# Altium PCB FPv1.3.5.PcbDoc (part 7 of 9)
Units mil, origin at the board's own origin, x right, y up, seen from the top; angles counter-clockwise.
Board outline 3200 x 2100 mil, 4 copper layers (Top Layer, GROUND PLANE, POWER PLANE, Bottom Layer); 98 components, 183 nets, 614 pads, 312 vias.
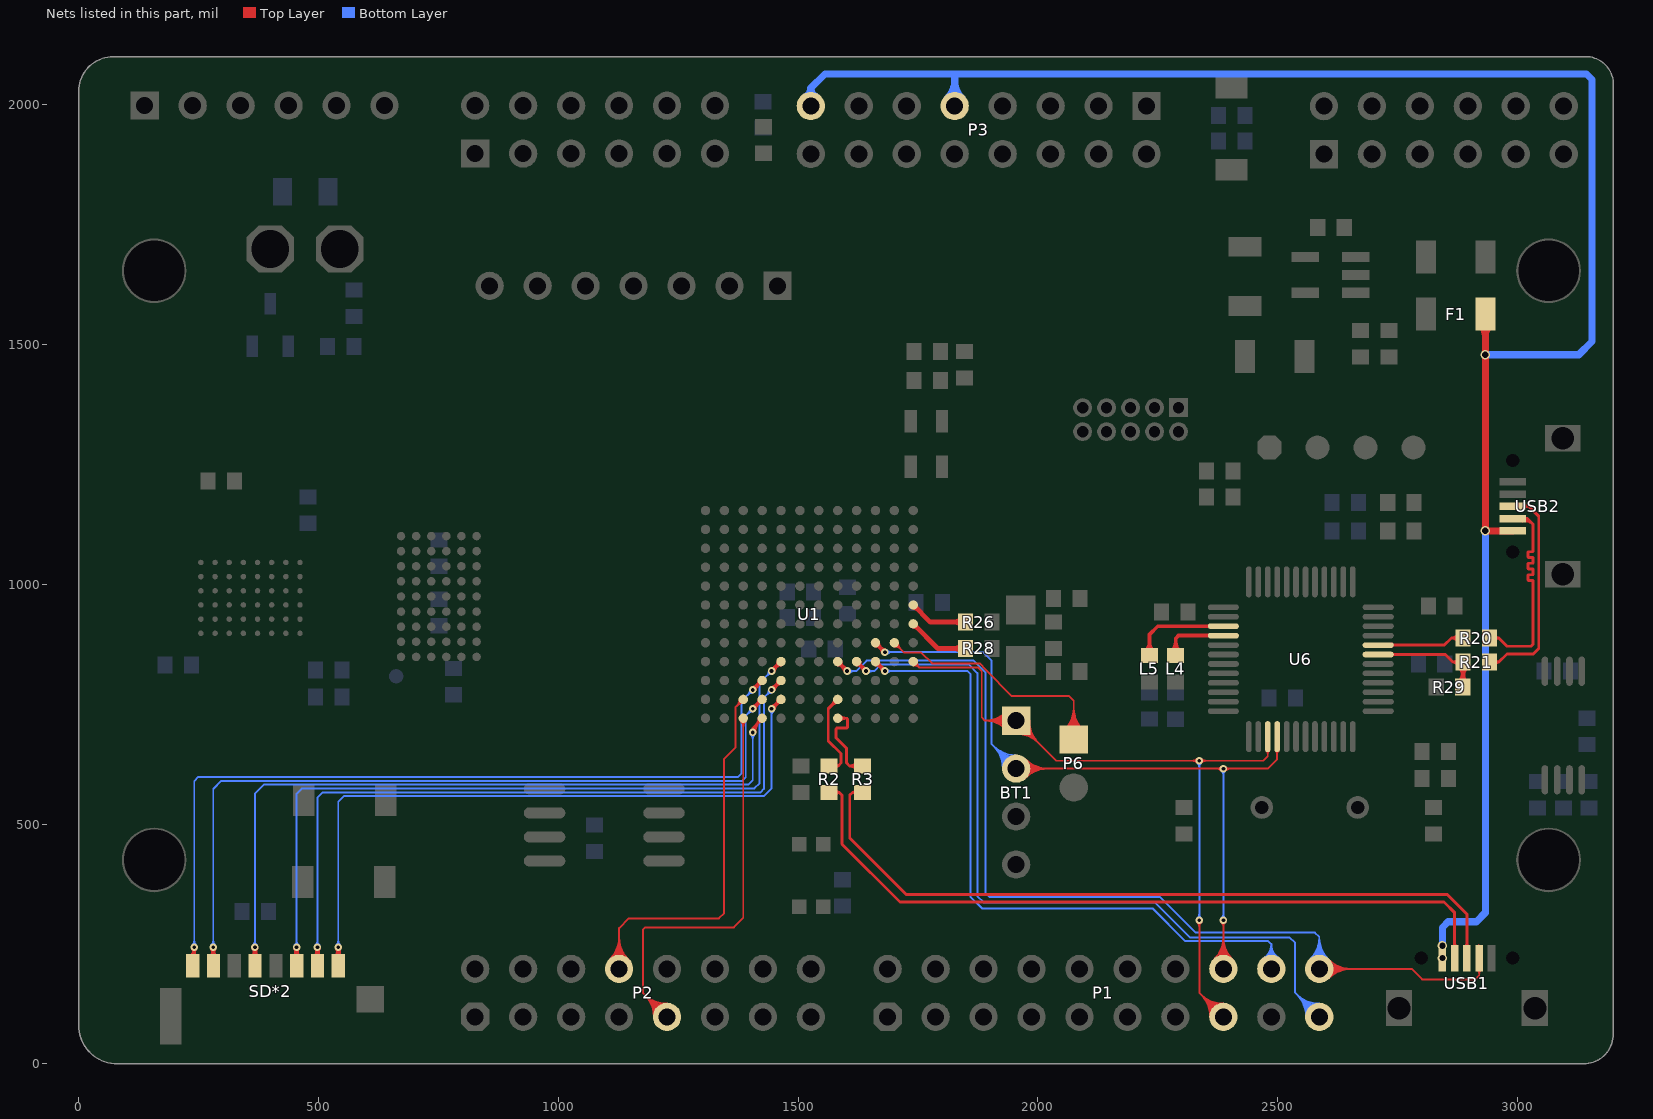
[diagram p9: the nets of this part, all layers, seen from the top]

## Via types
v1: diameter 15.87, hole 7.87, Top Layer to Bottom Layer, tented both sides, 261 vias
v2: diameter 19.8, hole 11.81, Top Layer to Bottom Layer, tented both sides, 25 vias
v3: diameter 23.62, hole 15.75, Top Layer to Bottom Layer, tented both sides, 11 vias
v4: diameter 20, hole 13, Top Layer to Bottom Layer, tented both sides, 5 vias
v5: diameter 27.68, hole 15.75, Top Layer to Bottom Layer, tented both sides, 3 vias
v6: diameter 23.74, hole 15.75, Top Layer to Bottom Layer, tented both sides, 2 vias
v7: diameter 19.8, hole 9.84, Top Layer to Bottom Layer, tented both sides, 2 vias
v8: diameter 23.62, hole 9.45, Top Layer to Bottom Layer, tented both sides, 1 vias
v9: diameter 17.24, hole 9.06, Top Layer to Bottom Layer, tented both sides, 1 vias
v10: diameter 23.74, hole 11.81, Top Layer to Bottom Layer, tented both sides, 1 vias

## Nets (pads, with @x,y where several pads share a name; then routed paths per layer and width w, separated by ;. In a path a pad name is that pad's centre, name@x,y a point inside that pad or via, vN(x,y) a via of type N, cw(c..) or ccw(c..) an arc to the next point about the centre after c; other vN are vias at no path point) (continued)
PTD14: P2.8 U1.C2 | length 1135.7
  Top Layer w4: P2.8@1107.35,217.3 ccw(c1060.35,264.29) 1126.81,264.29 ccw(c1193.27,264.29) P2.8@1146.28,217.3 ; P2.8@1110.17,214.47 ccw(c1070.01,254.64) 1126.81,254.64 ccw(c1183.61,254.64) P2.8@1143.45,214.47 ; P2.8@1113,211.64 ccw(c1079.67,244.98) 1126.81,244.98 ccw(c1173.95,244.98) P2.8@1140.62,211.64 ; P2.8@1115.83,208.81 ccw(c1089.32,235.32) 1126.81,235.32 ccw(c1164.3,235.32) P2.8@1137.79,208.81 ; P2.8@1126.81,197.83 1126.81,282.81 1147,303 1335,303 1346,314 1346,636 1369.98,659.98 1369.98,744 U1.C2@1385.83,759.84 ; U1.C2@1377.98,759.84 cw(c1359.05,759.84) 1372.44,746.45 cw(c1385.83,733.07) U1.C2@1385.83,752
PTD15: P2.9 U1.C1 | length 1194.1
  Top Layer w4: P2.9@1199.28,97.83 ccw(c1132.83,97.83) 1179.82,144.83 ccw(c1226.81,191.82) P2.9@1226.81,125.36 ; P2.9@1203.28,97.83 ccw(c1146.48,97.83) 1186.65,138 ccw(c1226.81,178.16) P2.9@1226.81,121.36 ; P2.9@1207.28,97.83 ccw(c1160.14,97.83) 1193.48,131.17 ccw(c1226.81,164.51) P2.9@1226.81,117.36 ; P2.9@1211.28,97.83 ccw(c1173.8,97.83) 1200.3,124.34 ccw(c1226.81,150.85) P2.9@1226.81,113.36 ; P2.9@1226.81,97.83 1177.17,147.48 1177.17,280.17 1181.45,284.45 1366.14,284.45 1385.83,304.13 U1.C1@1385.83,720.47 ; U1.C1@1380.28,714.93 cw(c1366.89,701.54) 1385.83,701.54 cw(c1404.76,701.54) U1.C1@1391.37,714.93
PTE0: SD*2.8 U1.D3 | length 2046
  Top Layer w4: SD*2.8@231.44,224.78 ccw(c218.97,243.11) v1(241.14,243.11) SD*2.8@241.14,207.28 ; SD*2.8@233.69,221.47 ccw(c224.11,235.55) v1@241.14,235.55 ; v1@236.57,239.32 cw(c230.31,234.13) 238.17,232.02 cw(c246.03,229.92) v1@243.2,237.55 ; v1@236.95,238.91 cw(c226.82,228.79) 241.14,228.79 cw(c255.47,228.79) v1@245.34,238.91 ; v1@237.22,238.66 cw(c231.74,232.45) 239.74,230.31 ; v1@238.18,237.97 cw(c234.13,230.96) 241.95,233.06 ; 240.55,233.33 cw(c247.93,231.35) v1@244.11,237.97 ; v1@241.14,236.06 ccw(c259.1,236.06) SD*2.8@246.4,223.37 ; 242.73,230.14 cw(c251.17,232.4) v1@245.2,238.78 ; v1@1404.01,785.27 ccw(c1398.48,806.37) U1.D3@1417.37,795.46 ; v1@1405.02,781.4 ccw(c1401.89,793.34) 1412.58,787.17 ; v1(1405.51,779.53) U1.D3@1425.2,799.21 ; v1@1405.51,785.46 ccw(c1405.51,799.78) 1415.64,789.66 ccw(c1425.77,779.53) v1@1411.44,779.53 ; v1@1407.38,779.04 cw(c1419.32,775.91) 1413.15,786.6 ; v1@1407.48,785.13 ccw(c1408.86,789.06) 1412.47,786.98 ; v1@1411.11,781.49 cw(c1415.05,782.88) 1412.96,786.49 ; v1@1411.25,778.02 cw(c1432.36,772.49) U1.D3@1421.45,791.39 ; U1.D3@1417.35,799.21 cw(c1398.42,799.21) 1411.81,785.82 cw(c1425.2,772.44) U1.D3@1425.2,791.37 ; v1@1407.05,785.26 ccw(c1408.72,791.49) 1411.94,785.9 cw(c1408.72,791.49) v1@1407.05,785.26 ; v1@1411.24,781.06 cw(c1417.48,782.73) 1411.89,785.96 ccw(c1417.48,782.73) v1@1411.24,781.06
  Bottom Layer w4: v1@236.95,247.31 ccw(c226.82,257.43) 241.14,257.43 ccw(c255.47,257.43) v1@245.34,247.31 ; v1(241.14,243.11) 241.14,589.57 249.65,598.07 1375.07,598.07 1382,605 1382,756.02 v1(1405.51,779.53) ; v1@1399.58,779.53 cw(c1385.26,779.53) 1395.38,769.4 cw(c1405.51,759.27) v1@1405.51,773.59
PTE1: SD*2.7 U1.D2 | length 1988.3
  Top Layer w4: SD*2.7@273.05,223.37 ccw(c254.69,241.73) v1@280.65,241.73 ; v1@275.67,239.89 cw(c264.65,232.74) 277.34,229.35 ; SD*2.7@275.88,220.54 ccw(c264.35,232.07) 280.65,232.07 ; v1@276.46,238.91 cw(c266.33,228.79) 280.65,228.79 cw(c294.98,228.79) v1@284.85,238.91 ; 277.52,230.02 cw(c290.17,226.63) v1@283.62,237.97 ; v1@277.92,237.84 cw(c272.28,226.95) 284.13,230.12 cw(c295.98,233.3) v1@285.65,239.91 ; SD*2.7@280.65,204.94 v1(280.65,243.11) ccw(c306.63,243.11) SD*2.7@289.26,223.8 ; 280.65,234.13 ccw(c298.55,234.13) SD*2.7@286.58,220.82 ; v1@1404.01,745.9 ccw(c1398.48,767) U1.D2@1417.37,756.09 ; v1@1405.02,742.03 ccw(c1401.89,753.97) 1412.58,747.8 ; v1(1405.51,740.16) U1.D2@1425.2,759.84 ; v1@1405.51,746.09 ccw(c1405.51,760.41) 1415.64,750.29 ccw(c1425.77,740.16) v1@1411.44,740.16 ; v1@1407.38,739.67 cw(c1419.32,736.54) 1413.15,747.23 ; v1@1407.48,745.76 ccw(c1408.86,749.69) 1412.47,747.61 ; v1@1411.11,742.12 cw(c1415.05,743.51) 1412.96,747.12 ; v1@1411.25,738.65 cw(c1432.36,733.12) U1.D2@1421.45,752.02 ; U1.D2@1417.35,759.84 cw(c1398.42,759.84) 1411.81,746.45 cw(c1425.2,733.07) U1.D2@1425.2,752 ; v1@1407.05,745.89 ccw(c1408.72,752.12) 1411.94,746.53 cw(c1408.72,752.12) v1@1407.05,745.89 ; v1@1411.24,741.69 cw(c1417.48,743.36) 1411.89,746.59 ccw(c1417.48,743.36) v1@1411.24,741.69
  Bottom Layer w4: v1@276.46,247.31 ccw(c266.33,257.43) 280.65,257.43 ccw(c294.98,257.43) v1@284.85,247.31 ; v1@280.51,249.02 v1@280.65,248.88 ; v1(280.65,243.11) v1@280.65,248.88 ; v1@1399.58,740.16 cw(c1385.26,740.16) 1395.38,730.03 cw(c1405.51,719.9) v1@1405.51,734.22 ; v1@1409.45,744.09 1391,725.65 1391,597.17 1383.9,590.07 297.75,590.07 280.65,572.98 v1@280.65,248.88
PTE2: SD*2.5 U1.D1 | length 1834.9
  Top Layer w4: SD*2.5@359.66,223.37 ccw(c340.63,242.4) v1@367.55,242.4 ; SD*2.5@362.49,220.54 ccw(c350.28,232.75) 367.55,232.75 ; v1@362.48,240.03 cw(c350.65,232.83) 364.02,229.25 ; v1@363.35,238.91 cw(c353.22,228.79) 367.55,228.79 cw(c381.87,228.79) v1@371.74,238.91 ; 364.13,229.65 cw(c377.36,226.11) v1@370.51,237.97 ; v1@364.73,237.89 cw(c358.58,226.47) 371.11,229.83 cw(c383.63,233.18) v1@372.6,239.99 ; SD*2.5@367.55,204.66 v1(367.55,243.11) ccw(c394.11,243.11) SD*2.5@376.02,223.66 ; 367.55,233.92 ccw(c385.56,233.92) SD*2.5@373.29,220.74 ; v1@1402.77,696.26 ccw(c1400.41,700.79) 1405.51,700.79 ; v1@1403.44,691 cw(c1422.08,691) 1408.9,704.18 ; v1(1405.51,691) 1405.51,700.79 ; v1@1407.44,691 cw(c1435.74,691) 1415.73,711.01 ; v1@1408.26,696.26 cw(c1410.62,700.79) 1405.51,700.79 ; v1@1411.44,691 cw(c1449.4,691) U1.D1@1422.56,717.84 ; U1.D1@1417.35,720.47 cw(c1398.42,720.47) 1411.81,707.08 cw(c1425.2,693.7) U1.D1@1425.2,712.63 ; U1.D1@1425.2,720.47 1405.51,700.79
  Bottom Layer w4: v1@363.35,247.31 ccw(c353.22,257.43) 367.55,257.43 ccw(c381.87,257.43) v1@371.74,247.31 ; v1(367.55,243.11) 367.55,563.41 386.2,582.07 1396.07,582.07 1405.51,591.51 v1(1405.51,691) ; v1@1401.32,686.8 cw(c1391.19,676.68) 1405.51,676.68 cw(c1419.84,676.68) v1@1409.71,686.8
PTE3: SD*2.3 U1.E4 | length 1922.3
  Top Layer w4: SD*2.3@446.28,223.37 ccw(c426.56,243.08) v1(454.44,243.11) ; SD*2.3@449.11,220.54 ccw(c436.22,233.43) 454.44,233.43 ; v1@449.3,240.14 cw(c436.88,232.97) 450.74,229.26 ; v1@450.25,238.91 cw(c440.12,228.79) 454.44,228.79 cw(c468.77,228.79) v1@458.64,238.91 ; 450.75,229.29 cw(c464.56,225.59) v1@457.41,237.97 ; v1@451.54,237.93 cw(c444.84,225.97) 458.08,229.52 cw(c471.33,233.07) v1@459.54,240.08 ; SD*2.3@454.44,204.38 v1(454.44,243.11) ; 454.44,233.71 ccw(c472.57,233.71) SD*2.3@460,220.64 ; SD*2.3@462.77,223.53 cw(c481.62,243.11) v1(454.44,243.11) ; v1@1443.38,824.64 ccw(c1437.85,845.74) U1.E4@1456.74,834.83 ; v1@1444.39,820.77 ccw(c1441.26,832.71) 1451.95,826.54 ; v1(1444.88,818.9) U1.E4@1464.57,838.58 ; v1@1444.88,824.83 ccw(c1444.88,839.15) 1455.01,829.03 ccw(c1465.14,818.9) v1@1450.81,818.9 ; v1@1446.75,818.41 cw(c1458.69,815.28) 1452.52,825.97 ; v1@1446.85,824.5 ccw(c1448.23,828.43) 1451.84,826.35 ; v1@1450.48,820.86 cw(c1454.42,822.25) 1452.33,825.86 ; v1@1450.62,817.39 cw(c1471.73,811.86) U1.E4@1460.82,830.76 ; U1.E4@1456.72,838.58 cw(c1437.79,838.58) 1451.18,825.19 cw(c1464.57,811.81) U1.E4@1464.57,830.74 ; v1@1446.42,824.63 ccw(c1448.09,830.86) 1451.32,825.27 cw(c1448.09,830.86) v1@1446.42,824.63 ; v1@1450.61,820.43 cw(c1456.85,822.1) 1451.26,825.33 ccw(c1456.85,822.1) v1@1450.61,820.43
  Bottom Layer w4: v1@450.25,247.31 ccw(c440.12,257.43) 454.44,257.43 ccw(c468.77,257.43) v1@458.64,247.31 ; v1(454.44,243.11) 454.44,562.71 465.8,574.07 1409.07,574.07 1420,585 1420,794.02 v1@1440.94,814.96 ; v1@1438.95,818.9 cw(c1424.63,818.9) 1434.75,808.77 cw(c1444.88,798.64) v1@1444.88,812.96
PTE4: SD*2.2 U1.E3 | length 1853.2
  Top Layer w4: SD*2.2@489.65,223.43 ccw(c470.28,243.11) v1(497.89,243.11) ; SD*2.2@492.46,220.58 ccw(c479.68,233.56) 497.89,233.56 ; v1@492.76,240.14 cw(c480.43,232.99) 494.19,229.31 cw(c507.95,225.62) v1@500.85,237.97 ; v1@493.7,238.91 cw(c483.57,228.79) 497.89,228.79 cw(c512.21,228.79) v1@502.09,238.91 ; v1@494.95,237.96 cw(c487.94,225.71) 501.57,229.36 cw(c515.2,233.01) v1@503.02,240.12 ; SD*2.2@497.91,204.21 v1(497.89,243.11) ; 497.89,233.6 ccw(c516.08,233.6) SD*2.2@503.36,220.6 ; SD*2.2@506.15,223.46 cw(c525.39,243.11) v1(497.89,243.11) ; v1@1443.38,785.27 ccw(c1437.85,806.37) U1.E3@1456.74,795.46 ; v1@1444.39,781.4 ccw(c1441.26,793.34) 1451.95,787.17 ; v1(1444.88,779.53) U1.E3@1464.57,799.21 ; v1@1444.88,785.46 ccw(c1444.88,799.78) 1455.01,789.66 ccw(c1465.14,779.53) v1@1450.81,779.53 ; v1@1446.75,779.04 cw(c1458.69,775.91) 1452.52,786.6 ; v1@1446.85,785.13 ccw(c1448.23,789.06) 1451.84,786.98 ; v1@1450.48,781.49 cw(c1454.42,782.88) 1452.33,786.49 ; v1@1450.62,778.02 cw(c1471.73,772.49) U1.E3@1460.82,791.39 ; U1.E3@1456.72,799.21 cw(c1437.79,799.21) 1451.18,785.82 cw(c1464.57,772.44) U1.E3@1464.57,791.37 ; v1@1446.42,785.26 ccw(c1448.09,791.49) 1451.32,785.9 cw(c1448.09,791.49) v1@1446.42,785.26 ; v1@1450.61,781.06 cw(c1456.85,782.73) 1451.26,785.96 ccw(c1456.85,782.73) v1@1450.61,781.06
  Bottom Layer w4: v1@493.7,247.31 ccw(c483.57,257.43) 497.89,257.43 ccw(c512.21,257.43) v1@502.09,247.31 ; v1(497.89,243.11) 497.89,554.98 508.98,566.07 1421.94,566.07 1429,573.13 1429,763.65 v1(1444.88,779.53) ; v1@1438.95,779.53 cw(c1424.63,779.53) 1434.75,769.4 cw(c1444.88,759.27) v1@1444.88,773.59
PTE5: SD*2.1 U1.E2 | length 1773.3
  Top Layer w4: SD*2.1@533.03,223.5 ccw(c514.06,243.11) v1(541.34,243.11) ; SD*2.1@535.81,220.63 ccw(c523.19,233.67) 541.34,233.67 ; v1@536.23,240.09 cw(c524.31,233.05) 537.68,229.47 cw(c551.05,225.89) v1@544.25,237.94 ; v1@537.14,238.91 cw(c527.01,228.79) 541.34,228.79 cw(c555.66,228.79) v1@545.53,238.91 ; v1@538.37,237.97 cw(c531.21,225.57) 545.04,229.28 ; SD*2.1@541.34,204.33 v1(541.34,243.11) ; 541.34,233.48 ccw(c559.58,233.48) SD*2.1@546.71,220.55 ; 545.05,229.27 cw(c558.88,232.98) v1@546.48,240.14 ; SD*2.1@549.53,223.39 cw(c569.17,243.11) v1(541.34,243.11) ; v1@1443.38,745.9 ccw(c1437.85,767) U1.E2@1456.74,756.09 ; v1@1444.39,742.03 ccw(c1441.26,753.97) 1451.95,747.8 ; v1(1444.88,740.16) U1.E2@1464.57,759.84 ; v1@1444.88,746.09 ccw(c1444.88,760.41) 1455.01,750.29 ccw(c1465.14,740.16) v1@1450.81,740.16 ; v1@1446.75,739.67 cw(c1458.69,736.54) 1452.52,747.23 ; v1@1446.85,745.76 ccw(c1448.23,749.69) 1451.84,747.61 ; v1@1450.48,742.12 cw(c1454.42,743.51) 1452.33,747.12 ; v1@1450.62,738.65 cw(c1471.73,733.12) U1.E2@1460.82,752.02 ; U1.E2@1456.72,759.84 cw(c1437.79,759.84) 1451.18,746.45 cw(c1464.57,733.07) U1.E2@1464.57,752 ; v1@1446.42,745.89 ccw(c1448.09,752.12) 1451.32,746.53 cw(c1448.09,752.12) v1@1446.42,745.89 ; v1@1450.61,741.69 cw(c1456.85,743.36) 1451.26,746.59 ccw(c1456.85,743.36) v1@1450.61,741.69
  Bottom Layer w4: v1@537.14,247.31 ccw(c527.01,257.43) 541.34,257.43 ccw(c555.66,257.43) v1@545.53,247.31 ; v1(541.34,243.11) 541.34,546.26 553.15,558.07 1428.07,558.07 1444.88,574.88 v1(1444.88,740.16) ; v1@1440.69,735.96 cw(c1430.56,725.83) 1444.88,725.83 cw(c1459.21,725.83) v1@1449.08,735.96
PTE24: BT1.1 P1.15 U1.M4 U6.39 | length 2604.2
  Top Layer w4: U1.M4@1740.16,838.58 1752.83,825.91 ; U1.M4@1740.47,830.75 cw(c1741.13,814.22) 1752.83,825.91 ; U1.M4@1747.99,838.27 ccw(c1764.52,837.61) 1752.83,825.91 ; BT1.1@1934.95,696.41 ccw(c1889.77,652.67) 1889.77,715.55 ; BT1.1@1934.95,734.7 cw(c1889.77,778.43) 1889.77,715.55 ; BT1.1@1937.82,699.19 ccw(c1899.21,661.81) 1899.21,715.55 ccw(c1899.21,769.29) BT1.1@1937.82,731.91 ; BT1.1@1940.69,701.97 ccw(c1908.64,670.95) 1908.64,715.55 ccw(c1908.64,760.16) BT1.1@1940.69,729.13 ; BT1.1@1943.57,704.75 ccw(c1918.08,680.08) 1918.08,715.55 ccw(c1918.08,751.02) BT1.1@1943.57,726.35 ; BT1.1@1954.72,688.02 cw(c1954.72,621.57) 2001.72,668.56 cw(c2048.71,715.55) BT1.1@1982.25,715.55 ; BT1.1@1954.72,692.02 cw(c1954.72,635.22) 1994.89,675.39 cw(c2035.05,715.55) BT1.1@1978.25,715.55 ; BT1.1@1954.72,696.02 cw(c1954.72,648.88) 1988.06,682.22 cw(c2021.4,715.55) BT1.1@1974.25,715.55 ; BT1.1@1954.72,700.02 cw(c1954.72,662.54) 1981.23,689.04 cw(c2007.74,715.55) BT1.1@1970.25,715.55 ; v1@2332.42,295.02 cw(c2322.29,284.89) 2336.61,284.89 cw(c2350.94,284.89) v1@2340.81,295.02 ; v1@2332.42,627.69 ccw(c2322.29,617.57) 2322.29,631.89 ccw(c2322.29,646.21) v1@2332.42,636.09 ; v1(2336.61,299.21) 2336.61,148.03 P1.15@2386.81,97.83 ; v1@2340.81,627.69 cw(c2350.94,617.57) 2350.94,631.89 cw(c2350.94,646.21) v1@2340.81,636.09 ; P1.15@2359.28,97.83 ccw(c2292.83,97.83) 2339.82,144.83 ccw(c2386.81,191.82) P1.15@2386.81,125.36 ; P1.15@2363.28,97.83 ccw(c2306.48,97.83) 2346.65,138 ccw(c2386.81,178.16) P1.15@2386.81,121.36 ; P1.15@2367.28,97.83 ccw(c2320.14,97.83) 2353.48,131.17 ccw(c2386.81,164.51) P1.15@2386.81,117.36 ; P1.15@2371.28,97.83 ccw(c2333.8,97.83) 2360.3,124.34 ccw(c2386.81,150.85) P1.15@2386.81,113.36 ; U6.39@2476.57,652.75 cw(c2469.9,646.08) 2479.33,646.08 cw(c2488.76,646.08) U6.39@2482.09,652.75 ; U6.39@2479.33,682.09 2479.33,640.75 2470.47,631.89 2038.39,631.89 BT1.1@1954.72,715.55 1889.76,715.55 ; 1752.83,825.91 1875.86,825.91 1883.03,818.75 1883.03,722.29 1889.76,715.55
  Bottom Layer w4: v1@2332.42,303.41 ccw(c2322.29,313.54) 2336.61,313.54 ccw(c2350.94,313.54) v1@2340.81,303.41 ; v1@2332.42,627.69 cw(c2322.29,617.57) 2336.61,617.57 cw(c2350.94,617.57) v1@2340.81,627.69 ; v1(2336.61,299.21) v1(2336.61,631.89)
PTE25: BT1.2 P1.16 U1.K5 U6.40 | length 2791
  Top Layer w4: U1.K5@1661.42,870.11 cw(c1661.42,851.18) 1674.81,864.56 cw(c1688.19,877.95) U1.K5@1669.26,877.95 ; U1.K5@1661.42,877.95 v1(1681.1,858.27) ; U1.K5@1665.17,870.13 cw(c1654.26,851.23) v1@1675.36,856.76 ; U1.K5@1669.24,874.2 ccw(c1688.14,885.11) v1@1682.61,864.01 ; 1673.46,865.34 cw(c1667.29,854.65) v1@1679.23,857.78 ; 1673.65,865.23 cw(c1671.57,861.62) v1@1675.5,860.23 ; 1674.03,865.91 ccw(c1684.72,872.08) v1@1681.59,860.14 ; 1674.14,865.72 ccw(c1677.75,867.8) v1@1679.14,863.87 ; v1@1675.17,858.27 ccw(c1660.85,858.27) 1670.97,868.4 ccw(c1681.1,878.52) v1@1681.1,864.2 ; BT1.2@1954.72,608.66 1961.61,615.55 2479.72,615.55 2499.02,634.84 U6.40@2499.02,682.09 ; BT1.2@1965.7,604.57 cw(c1992.21,578.06) 1992.21,615.55 cw(c1992.21,653.04) BT1.2@1965.7,626.53 ; BT1.2@1968.53,601.74 cw(c2001.87,568.41) 2001.87,615.55 cw(c2001.87,662.69) BT1.2@1968.53,629.36 ; BT1.2@1971.36,598.91 cw(c2011.52,558.75) 2011.52,615.55 cw(c2011.52,672.35) BT1.2@1971.36,632.19 ; BT1.2@1974.19,596.09 cw(c2021.18,549.09) 2021.18,615.55 cw(c2021.18,682.01) BT1.2@1974.19,635.02 ; P1.16@2367.35,217.3 ccw(c2320.35,264.29) 2386.81,264.29 ccw(c2453.27,264.29) P1.16@2406.28,217.3 ; P1.16@2370.17,214.47 ccw(c2330.01,254.64) 2386.81,254.64 ccw(c2443.61,254.64) P1.16@2403.45,214.47 ; 2371.54,615.55 cw(c2371.54,599.88) v1@2382.62,610.96 ; P1.16@2373,211.64 ccw(c2339.67,244.98) 2386.81,244.98 ccw(c2433.95,244.98) P1.16@2400.62,211.64 ; 2373.44,615.55 ccw(c2373.44,628.53) v1@2382.62,619.35 ; P1.16@2375.83,208.81 ccw(c2349.32,235.32) 2386.81,235.32 ccw(c2424.3,235.32) P1.16@2397.79,208.81 ; v1@2382.62,295.02 cw(c2372.49,284.89) 2386.81,284.89 cw(c2401.13,284.89) v1@2391.01,295.02 ; P1.16@2386.81,197.83 v1(2386.81,299.21) ; v1@2391.01,610.96 cw(c2402.09,599.88) 2402.09,615.55 ; v1@2391.01,619.35 ccw(c2400.18,628.53) 2400.18,615.55 ; U6.40@2496.25,652.75 cw(c2489.59,646.08) 2499.02,646.08 cw(c2508.44,646.08) U6.40@2501.78,652.75 ; 1674.67,864.64 ccw(c1677.9,870.23) 1679.57,864 cw(c1677.9,870.23) 1674.67,864.64 ; 1674.73,864.7 cw(c1669.14,861.47) 1675.37,859.8 ccw(c1669.14,861.47) 1674.73,864.7
  Bottom Layer w4: v1(1681.1,858.27) 1885.73,858.27 1903.54,840.46 1903.54,666.73 BT1.2@1954.72,615.55 ; v1@1685.3,854.07 cw(c1695.43,843.94) 1695.43,858.27 cw(c1695.43,872.59) v1@1685.3,862.46 ; BT1.2@1927.2,615.55 ccw(c1860.74,615.55) 1907.73,662.54 ccw(c1954.72,709.54) BT1.2@1954.72,643.08 ; BT1.2@1931.2,615.55 ccw(c1874.4,615.55) 1914.56,655.72 ccw(c1954.72,695.88) BT1.2@1954.72,639.08 ; BT1.2@1935.2,615.55 ccw(c1888.05,615.55) 1921.39,648.89 ccw(c1954.72,682.22) BT1.2@1954.72,635.08 ; BT1.2@1939.2,615.55 ccw(c1901.71,615.55) 1928.22,642.06 ccw(c1954.72,668.57) BT1.2@1954.72,631.08 ; v1@2382.62,303.41 ccw(c2372.49,313.54) 2386.81,313.54 ccw(c2401.13,313.54) v1@2391.01,303.41 ; v1@2382.62,610.96 cw(c2372.49,600.83) 2386.81,600.83 cw(c2401.13,600.83) v1@2391.01,610.96 ; v1(2386.81,299.21) v1(2386.81,615.16)
PTE26: P1.18 U1.K4 | length 1727.6
  Top Layer w4: U1.K4@1661.42,830.74 cw(c1661.42,811.81) 1674.81,825.19 cw(c1688.19,838.58) U1.K4@1669.26,838.58 ; U1.K4@1661.42,838.58 v1(1681.1,818.9) ; U1.K4@1665.17,830.76 cw(c1654.26,811.86) v1@1675.36,817.39 ; U1.K4@1669.24,834.83 ccw(c1688.14,845.74) v1@1682.61,824.64 ; 1673.46,825.97 cw(c1667.29,815.28) v1@1679.23,818.41 ; 1673.65,825.86 cw(c1671.57,822.25) v1@1675.5,820.86 ; 1674.03,826.54 ccw(c1684.72,832.71) v1@1681.59,820.77 ; 1674.14,826.35 ccw(c1677.75,828.43) v1@1679.14,824.5 ; v1@1675.17,818.9 ccw(c1660.85,818.9) 1670.97,829.03 ccw(c1681.1,839.15) v1@1681.1,824.83 ; 1674.67,825.27 ccw(c1677.9,830.86) 1679.57,824.63 cw(c1677.9,830.86) 1674.67,825.27 ; 1674.73,825.33 cw(c1669.14,822.1) 1675.37,820.43 ccw(c1669.14,822.1) 1674.73,825.33
  Bottom Layer w4: v1(1681.1,818.9) 1853.6,818.9 1859.25,813.24 1859.25,348.43 1883.86,323.82 2239.17,323.82 2307.21,255.78 2480.44,255.78 2486.81,249.41 ; v1@1685.3,814.7 cw(c1695.43,804.57) 1695.43,818.9 cw(c1695.43,833.22) v1@1685.3,823.09 ; P1.18@2471.49,220.71 ccw(c2452.26,249.41) 2486.81,249.41 ; P1.18@2473.72,217.38 ccw(c2457.28,241.91) 2486.81,241.91 ccw(c2516.34,241.91) P1.18@2499.91,217.38 ; P1.18@2475.94,214.06 ccw(c2462.3,234.42) 2486.81,234.42 ccw(c2511.32,234.42) P1.18@2497.68,214.06 ; P1.18@2486.81,197.83 2486.81,249.41 ; P1.18@2502.13,220.71 cw(c2521.36,249.41) 2486.81,249.41
PTE27: P1.19 U1.J4 | length 2103.6
  Top Layer w4: U1.J4@1622.05,830.74 cw(c1622.05,811.81) 1635.44,825.19 cw(c1648.82,838.58) U1.J4@1629.89,838.58 ; U1.J4@1622.05,838.58 v1(1641.73,818.9) ; U1.J4@1625.8,830.76 cw(c1614.89,811.86) v1@1635.99,817.39 ; U1.J4@1629.87,834.83 ccw(c1648.77,845.74) v1@1643.24,824.64 ; 1634.09,825.97 cw(c1627.92,815.28) v1@1639.86,818.41 ; 1634.28,825.86 cw(c1632.2,822.25) v1@1636.13,820.86 ; 1634.66,826.54 ccw(c1645.35,832.71) v1@1642.22,820.77 ; 1634.77,826.35 ccw(c1638.38,828.43) v1@1639.77,824.5 ; v1@1635.8,818.9 ccw(c1621.48,818.9) 1631.6,829.03 ccw(c1641.73,839.15) v1@1641.73,824.83 ; 1635.3,825.27 ccw(c1638.53,830.86) 1640.2,824.63 cw(c1638.53,830.86) 1635.3,825.27 ; 1635.36,825.33 cw(c1629.77,822.1) 1636,820.43 ccw(c1629.77,822.1) 1635.36,825.33
  Bottom Layer w4: v1(1641.73,818.9) 1658.9,818.9 1672.83,832.83 1855.81,832.83 1874.02,814.63 1874.02,349.41 1886.81,336.61 2244.09,336.61 2316.93,263.78 2524.61,263.78 2536.42,251.97 2536.42,148.23 P1.19@2586.81,97.83 ; v1@1645.93,814.7 cw(c1656.06,804.57) 1656.06,818.9 cw(c1656.06,833.22) v1@1645.93,823.09 ; P1.19@2559.28,97.83 ccw(c2492.83,97.83) 2539.82,144.83 ccw(c2586.81,191.82) P1.19@2586.81,125.36 ; P1.19@2563.28,97.83 ccw(c2506.48,97.83) 2546.65,138 ccw(c2586.81,178.16) P1.19@2586.81,121.36 ; P1.19@2567.28,97.83 ccw(c2520.14,97.83) 2553.48,131.17 ccw(c2586.81,164.51) P1.19@2586.81,117.36 ; P1.19@2571.28,97.83 ccw(c2533.8,97.83) 2560.3,124.34 ccw(c2586.81,150.85) P1.19@2586.81,113.36
PTE28: P1.20 U1.H4 USB1.4 | length 2841.9
  Top Layer w4: U1.H4@1582.68,830.74 cw(c1582.68,811.81) 1596.06,825.19 cw(c1609.45,838.58) U1.H4@1590.52,838.58 ; U1.H4@1582.68,838.58 v1(1602.36,818.9) ; U1.H4@1586.43,830.76 cw(c1575.52,811.86) v1@1596.62,817.39 ; U1.H4@1590.5,834.83 ccw(c1609.4,845.74) v1@1603.87,824.64 ; 1594.72,825.97 cw(c1588.55,815.28) v1@1600.49,818.41 ; 1594.91,825.86 cw(c1592.83,822.25) v1@1596.76,820.86 ; 1595.29,826.54 ccw(c1605.98,832.71) v1@1602.85,820.77 ; 1595.4,826.35 ccw(c1599.01,828.43) v1@1600.4,824.5 ; v1@1596.43,818.9 ccw(c1582.11,818.9) 1592.23,829.03 ccw(c1602.36,839.15) v1@1602.36,824.83 ; P1.20@2586.81,197.83 2779.17,197.83 2801,176 2912,176 2920.27,184.27 USB1.4@2920.27,220.47 ; P1.20@2597.79,186.85 cw(c2624.3,160.35) 2624.3,197.83 cw(c2624.3,235.32) P1.20@2597.79,208.81 ; P1.20@2600.62,184.03 cw(c2633.95,150.69) 2633.95,197.83 cw(c2633.95,244.98) P1.20@2600.62,211.64 ; P1.20@2603.45,181.2 cw(c2643.61,141.03) 2643.61,197.83 cw(c2643.61,254.64) P1.20@2603.45,214.47 ; P1.20@2606.28,178.37 cw(c2653.27,131.38) 2653.27,197.83 cw(c2653.27,264.29) P1.20@2606.28,217.3 ; USB1.4@2916.12,196.63 cw(c2906.09,186.61) 2920.27,186.61 cw(c2934.46,186.61) USB1.4@2924.43,196.63 ; USB1.4@2919.29,220.47 2919.29,248.03 ; 1595.93,825.27 ccw(c1599.16,830.86) 1600.83,824.63 cw(c1599.16,830.86) 1595.93,825.27 ; 1595.99,825.33 cw(c1590.4,822.1) 1596.63,820.43 ccw(c1590.4,822.1) 1595.99,825.33
  Bottom Layer w4: v1(1602.36,818.9) 1620.9,818.9 1642.83,840.83 1866.17,840.83 1890.75,816.25 1890.75,356.3 1899.61,347.44 2254.92,347.44 2328.74,273.62 2577.76,273.62 2586.81,264.57 P1.20@2586.81,197.83 ; v1@1606.56,814.7 cw(c1616.69,804.57) 1616.69,818.9 cw(c1616.69,833.22) v1@1606.56,823.09 ; P1.20@2567.35,217.3 ccw(c2520.35,264.29) 2586.81,264.29 ccw(c2653.27,264.29) P1.20@2606.28,217.3 ; P1.20@2570.17,214.47 ccw(c2530.01,254.64) 2586.81,254.64 ccw(c2643.61,254.64) P1.20@2603.45,214.47 ; P1.20@2573,211.64 ccw(c2539.67,244.98) 2586.81,244.98 ccw(c2633.95,244.98) P1.20@2600.62,211.64 ; P1.20@2575.83,208.81 ccw(c2549.32,235.32) 2586.81,235.32 ccw(c2624.3,235.32) P1.20@2597.79,208.81
RTC_WAKE: P6.1 U1.L5 | length 861.4
  Top Layer w4: U1.L5@1700.79,870.11 cw(c1700.79,851.18) 1714.18,864.56 cw(c1727.56,877.95) U1.L5@1708.63,877.95 ; U1.L5@1700.79,877.95 1721.46,857.28 1756.89,857.28 1779.53,834.65 1878.44,834.65 1891.03,822.06 1891.03,821.57 1945.87,766.73 2064.96,766.73 2074.8,756.89 P6.1@2074.8,676.18 ; P6.1@2055.34,695.65 ccw(c2008.35,742.64) 2074.8,742.64 ccw(c2141.26,742.64) P6.1@2094.27,695.65 ; P6.1@2058.17,692.82 ccw(c2018,732.98) 2074.8,732.98 ccw(c2131.6,732.98) P6.1@2091.44,692.82 ; P6.1@2061,689.99 ccw(c2027.66,723.32) 2074.8,723.32 ccw(c2121.95,723.32) P6.1@2088.61,689.99 ; P6.1@2063.82,687.16 ccw(c2037.32,713.67) 2074.8,713.67 ccw(c2112.29,713.67) P6.1@2085.78,687.16
RTCX1: R28.2 U1.M6 | length 189.8
  Top Layer w10: U1.M6@1740.16,912.48 cw(c1740.16,900.79) 1748.42,909.06 cw(c1756.69,917.32) U1.M6@1745,917.32 ; U1.M6@1740.16,917.32 1791.54,865.94 R28.2@1849.57,865.94 ; R28.2@1841.97,858.34 ccw(c1823.62,840) 1823.62,865.94 ccw(c1823.62,891.89) R28.2@1841.97,873.54
RTCX2: R26.2 U1.M7 | length 183.3
  Top Layer w10: U1.M7@1740.16,951.85 cw(c1740.16,940.16) 1748.42,948.43 cw(c1756.69,956.69) U1.M7@1745,956.69 ; U1.M7@1740.16,956.69 1775.91,920.94 R26.2@1849.57,920.94 ; R26.2@1841.97,913.34 ccw(c1823.62,895) 1823.62,920.94 ccw(c1823.62,946.89) R26.2@1841.97,928.54
RXD_LED: L4.2 U6.28 | length 181.8
  Top Layer w8: L4.2@2279.09,859.68 ccw(c2259.04,879.74) 2287.4,879.74 ccw(c2315.76,879.74) L4.2@2295.71,859.68 ; L4.2@2287.4,851.38 2287.4,886.81 2293.31,892.72 U6.28@2386.81,892.72
TXD_LED: L5.2 U6.27 | length 249.4
  Top Layer w8: L5.2@2224.33,859.84 ccw(c2204.28,879.9) 2232.64,879.9 ccw(c2261,879.9) L5.2@2240.94,859.84 ; L5.2@2232.64,851.54 2232.64,895.04 2250,912.4 U6.27@2386.81,912.4
USB0D_N: R20.2 U6.8 | length 230.3
  Top Layer w6: U6.8@2709.65,873.03 2847.44,873.03 2862.2,887.8 ; U6.8@2738.27,870.98 cw(c2743.23,866.02) 2743.23,873.03 cw(c2743.23,880.05) U6.8@2738.27,875.09 ; R20.2@2876.4,880.44 ccw(c2862.21,870.42) 2862.21,887.8 ; R20.2@2876.4,895.15 cw(c2862.21,905.17) 2862.21,887.8 ; R20.2@2886.81,887.8 2862.2,887.8
  Top Layer w8: R20.2@2884.84,887.8 R20.2@2886.81,885.83
USB0D_P: R21.2 R29.1 U6.7 | length 454.5
  Top Layer w6: U6.7@2709.65,853.35 2849.41,853.35 2865.16,837.6 ; U6.7@2738.27,851.29 cw(c2743.23,846.33) 2743.23,853.35 cw(c2743.23,860.36) U6.7@2738.27,855.4 ; R21.2@2875.66,831.41 ccw(c2865.16,825.58) 2865.16,837.6 ; R21.2@2875.66,843.78 cw(c2865.16,849.61) 2865.16,837.6 ; R29.1@2876.81,796.42 ccw(c2855.05,818.18) 2885.83,818.18 ccw(c2916.6,818.18) R29.1@2894.84,796.42 ; R21.2@2877.8,826.62 cw(c2858.41,807.23) 2885.83,807.23 ; R29.1@2879.45,798.44 ccw(c2870.73,813.56) 2887.59,809.04 ; R29.1@2881.06,792.17 ccw(c2869.54,803.69) 2885.83,803.69 ccw(c2902.12,803.69) R29.1@2890.6,792.17 ; R29.1@2885.83,802.48 cw(c2919.96,802.48) R21.2@2895.83,826.62 ; 2885.83,816.96 cw(c2905.48,816.96) R21.2@2891.58,830.86 ; R21.2@2885.83,836.61 R29.1@2885.83,785.43 R29.1@2886.81,786.42 ; 2886.27,804.15 ccw(c2896.94,801.29) R29.1@2890.04,792.67 ; R21.2@2886.81,837.6 2865.16,837.6 ; 2888.65,813.02 ccw(c2903.2,809.12) R29.1@2893.79,797.36
USB0R_N: R20.1 USB2.2 | length 524.7
  Top Layer w6: R20.1@2941.93,887.8 2961.11,887.8 ; R20.1@2953.68,882.86 cw(c2961.11,879.74) 2961.11,887.8 ; R20.1@2953.68,892.73 ccw(c2961.11,895.85) 2961.11,887.8 ; USB2.2@2990.16,1136.81 3020.67,1136.81 ; USB2.2@3009.65,1137.92 cw(c3012.49,1121.71) 3024.13,1133.35 ; USB2.2@3010.69,1132.01 cw(c3014.93,1107.83) 3032.29,1125.19 ; USB2.2@3013.49,1133.58 cw(c3020.67,1127.22) 3020.67,1136.81 ; USB2.2@3013.49,1140.04 ccw(c3020.67,1146.4) 3020.67,1136.81 ; 2961.11,887.8 2978.21,870.7 3028.18,870.7 3032.29,874.81 3032.29,1006.43 ccw(c3031.09,1006.43) 3031.09,1007.63 3023.49,1007.63 cw(c3023.49,1008.83) 3022.29,1008.83 3022.29,1018.43 cw(c3023.49,1018.43) 3023.49,1019.63 3031.09,1019.63 ccw(c3031.09,1020.83) 3032.29,1020.83 3032.29,1030.43 ccw(c3031.09,1030.43) 3031.09,1031.63 3023.49,1031.63 cw(c3023.49,1032.83) 3022.29,1032.83 3022.29,1042.43 cw(c3023.49,1042.43) 3023.49,1043.63 3031.09,1043.63 ccw(c3031.09,1044.83) 3032.29,1044.83 3032.29,1054.43 ccw(c3031.09,1054.43) 3031.09,1055.63 3023.49,1055.63 cw(c3023.49,1056.83) 3022.29,1056.83 3022.29,1066.43 cw(c3023.49,1066.43) 3023.49,1067.63 3031.09,1067.63 ccw(c3031.09,1068.83) 3032.29,1068.83 3032.29,1125.19 ; 3020.67,1136.81 3032.29,1125.19
USB0R_P: R21.1 USB2.3 | length 489.8
  Top Layer w6: R21.1@2941.93,837.6 2961.11,837.6 ; R21.1@2953.68,832.66 cw(c2961.11,829.55) 2961.11,837.6 ; R21.1@2953.68,842.53 ccw(c2961.11,845.65) 2961.11,837.6 ; USB2.3@2990.16,1162.4 3023.62,1162.4 3044.29,1141.73 3044.29,866.14 3032.85,854.7 2978.21,854.7 2961.11,837.6 ; USB2.3@3013.29,1158.96 cw(c3021.61,1150.63) 3021.61,1162.4 cw(c3021.61,1174.17) USB2.3@3013.29,1165.85
USB1D_N: R2.1 U1.H2 | length 217
  Top Layer w6: R2.1@1564.96,621.06 1583.66,621.06 ; U1.H2@1575.83,759.84 cw(c1559.32,759.84) 1571,748.16 cw(c1582.68,736.48) U1.H2@1582.68,753 ; R2.1@1579.22,617.68 cw(c1583.66,616.46) 1583.66,621.06 ; R2.1@1579.22,624.45 ccw(c1583.66,625.67) 1583.66,621.06 ; U1.H2@1582.68,759.84 1562.99,740.16 1562.99,673.24 1589.57,646.66 1589.57,626.97 1583.66,621.06
USB1D_P: R3.1 U1.H1 | length 242
  Top Layer w6: U1.H1@1582.68,720.47 1601.38,720.47 1603.35,718.5 1603.35,701.77 1601.38,699.8 1580.71,699.8 1578.99,698.09 1578.99,679.87 1601.38,657.48 1601.38,626.97 1607.28,621.06 ; U1.H1@1587.52,715.63 cw(c1599.2,703.95) 1599.2,720.47 cw(c1599.2,736.99) U1.H1@1587.52,725.31 ; R3.1@1622.7,613.38 ccw(c1607.28,601.75) 1607.28,621.06 ; R3.1@1622.7,628.74 cw(c1607.28,640.37) 1607.28,621.06 ; R3.1@1634.84,621.06 1607.28,621.06
USBPD_N: R2.2 USB1.2 | length 1599.6
  Top Layer w6: R2.2@1564.96,565.94 1586.04,565.94 ; R2.2@1578.7,561.05 cw(c1586.04,557.99) 1586.04,565.94 ; R2.2@1578.7,570.84 ccw(c1586.04,573.9) 1586.04,565.94 ; USB1.2@2865.65,243.6 ccw(c2857.33,251.92) 2869.09,251.92 ccw(c2880.86,251.92) USB1.2@2872.54,243.6 ; USB1.2@2869.09,220.47 2869.09,314.97 2846.72,337.35 1712.49,337.35 1591.9,457.94 1591.9,560.08 1586.04,565.94
USBPD_P: R3.2 USB1.3 | length 1600.5
  Top Layer w6: R3.2@1621.14,560.96 ccw(c1613.6,557.75) 1613.6,565.94 ; R3.2@1621.14,570.93 cw(c1613.6,574.14) 1613.6,565.94 ; R3.2@1634.84,565.94 1613.6,565.94 ; USB1.3@2891.24,243.6 ccw(c2882.92,251.92) 2894.68,251.92 ccw(c2906.45,251.92) USB1.3@2898.13,243.6 ; USB1.3@2894.68,220.47 2894.68,312.01 2853.35,353.35 1725.39,353.35 1607.9,470.84 1607.9,560.25 1613.6,565.94
VCC: F1.1 P3.9 P3.15 USB1.1 USB2.1 | length 4178.4
  Top Layer w15: F1.1@2923.76,1539.9 cw(c2901.28,1517.42) 2933.07,1517.42 cw(c2964.86,1517.42) F1.1@2942.38,1539.9 ; F1.1@2933.07,1562.99 v4(2933.07,1111.22) USB2.1@2990.16,1111.22
  Bottom Layer w15: P3.15@1515.92,2016.3 ccw(c1505.81,2034.49) 1526.61,2034.49 ; P3.15@1526.61,1997.05 1526.61,2034.49 ; P3.15@1537.31,2016.3 cw(c1547.42,2034.49) 1526.61,2034.49 ; P3.9@1811.04,2012.62 ccw(c1773.44,2050.23) 1826.61,2050.23 ccw(c1879.79,2050.23) P3.9@1842.19,2012.62 ; P3.9@1826.61,1997.05 1826.61,2062.83 ; v4(2843.5,220.47) v4(2843.5,246.06) 2843.5,284.45 2855.32,296.26 2914.37,296.26 2933.07,314.96 v4(2933.07,1111.22) ; v4(2933.07,1478.35) 3127.95,1478.35 3155.51,1505.91 3155.51,2052.17 3143.7,2063.98 1556.1,2063.98 1526.61,2034.49
pads on no net: P3.1 SD*2.0 U1.A10 U1.B10 U1.C10 U1.M5 U3.A2 U3.A5 U3.B3 U3.B4 U3.H3 U3.H4 U3.J2 U3.J5 U4.E3 U4.H6 U6.29 U6.30 U6.32 U6.33 U6.35 U6.36 U6.37 U6.38 U6.41 USB1.0 USB1.6 USB1.7 USB2.0 USB2.4 USB2.6 USB2.7 XTAL1.1
copper on no net: | length 28658